# Altium PCB Smart_Farm_PCB.pcbdoc (part 2 of 2)
Units mm, origin at the board's own origin, x right, y up, seen from the top; angles counter-clockwise.
Board outline 238 x 152.38 mm, 2 copper layers (Top Layer, Bottom Layer); 109 components, 81 nets, 498 pads, 409 vias.
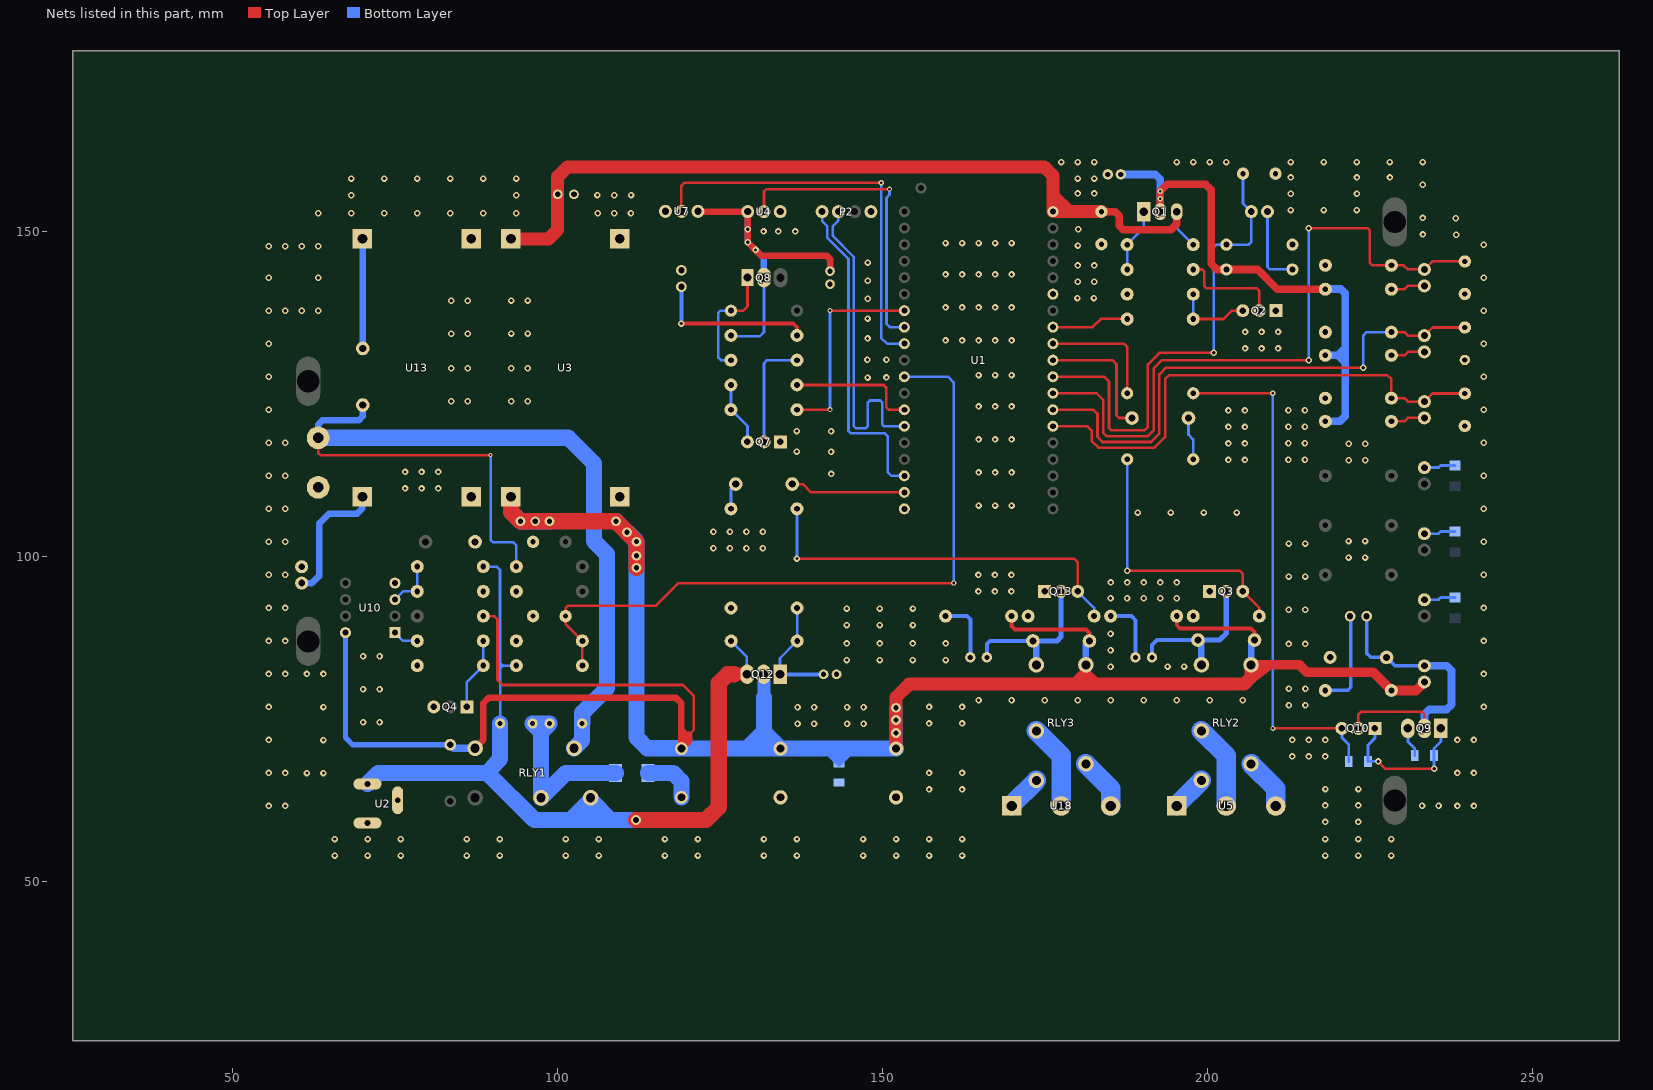
[diagram p2: the nets of this part, all layers, seen from the top]

## Via types
v1: diameter 1, hole 0.5, Top Layer to Bottom Layer, tented both sides, 377 vias
v2: diameter 0.8, hole 0.4, Top Layer to Bottom Layer, tented both sides, 18 vias
v3: diameter 1.5, hole 0.8, Top Layer to Bottom Layer, tented both sides, 12 vias
v4: diameter 0.62, hole 0.31, Top Layer to Bottom Layer, tented both sides, 1 vias
v5: diameter 1.5, hole 0.9, Top Layer to Bottom Layer, tented both sides, 1 vias

## Nets (pads, with @x,y where several pads share a name; then routed paths per layer and width w, separated by ;. In a path a pad name is that pad's centre, name@x,y a point inside that pad or via, vN(x,y) a via of type N, cw(c..) or ccw(c..) an arc to the next point about the centre after c; other vN are vias at no path point) (continued)
D5_1: D5.1 pad.2@197.091,121.235 R18.1 | length 6.7
  Bottom Layer w0.4: pad.2@197.091,121.235 197.091,118.667 197.82,117.938 R18.1@197.82,114.885
DHT_ENA: pad.1@136.86,122.515 pad.20@153.37,137.75 R12.1 U1.26 | length 31.8
  Top Layer w0.4: R12.1@136.86,122.515 136.874,122.53 v2(141.94,122.53) ; v2(141.94,137.78) 141.94,137.75 U1.26@153.37,137.75
  Bottom Layer w0.4: v2(141.94,122.53) v2(141.94,137.78)
DHT_PIN: pad.2@131.78,152.99 pad.20@153.37,135.21 U1.27 U4.2 | length 46.5
  Top Layer w0.4: U4.2@131.78,152.99 131.78,156.109 132.13,156.46 v2(151.1,156.46)
  Bottom Layer w0.4: v2(151.1,156.46) 151.099,155.591 150.629,155.121 150.629,135.741 151.16,135.21 U1.27@153.37,135.21
GND: C1.1 C3.1 C5.2 C6.1 C7.2 C8.1 C9.1 C10.1 C11.1 C12.1 C13.1 C14.1 D3.2 D4.1 LED3.2 P2.4 pad.1@78.44,83.14 pad.1@93.68,86.95 pad.1@93.68,94.57 pad.1@96.26,90.76 pad.1@96.26,102.19 pad.1@126.71,92.01 pad.1@136.86,126.325 pad.1@172.42,90.76 pad.1@174.96,94.57 pad.1@183.69,147.98 pad.1@187.66,140.285 pad.1@197.82,90.76 pad.1@200.36,94.57 pad.1@210.48,158.832 pad.1@210.52,137.75 pad.1@218.14,124.288 pad.1@218.14,134.448 pad.1@218.14,144.735 pad.1@239.603,140.33 pad.2@134.28,152.99 pad.2@141.94,141.83 pad.2@142.95,81.81 pad.2@233.38,93.28 pad.2@233.38,103.44 pad.2@233.38,113.6 pad.3@230.84,73.488 pad.4@75.011,95.84 pad.4@80.98,76.79 pad.20@153.37,122.51 Q2.1 Q3.1 Q4.3 Q7.1 Q9.3 Q13.1 R2.1 R3.1 R7.2 R13.2 R16.1 R19.1 R21.1 R23.1 R25.1 R26.1 R32.1 R35.1 R36.1 R39.1 R48.2 U1.6 U1.32 U1.38 U2.2 U2.3 U3.2 U3.4 U4.1 U7.3 U10.4 U11.2 U12.2 U13.2 U13.4 U15.1 U16.1 U17.1 U20.2 U21.2 U22.2 U23.2 | length 39
  Top Layer w0.4: R13.2@136.86,126.325 150.185,126.325 150.571,125.939 150.571,122.919 150.98,122.51 U1.32@153.37,122.51
  Bottom Layer w0.45: Q9.3@230.84,73.488 230.84,71.456 231.902,70.394 R25.1@231.901,69.297 ; U15.1@233.38,93.28 235.519,93.28 235.862,93.623 C6.1@238.079,93.622 ; U16.1@233.38,103.44 235.519,103.44 235.862,103.783 C8.1@238.079,103.782 ; U17.1@233.38,113.6 235.519,113.6 235.862,113.943 C9.1@238.079,113.942
  other v1: 65.74,53.93 70.82,53.93 75.9,53.93 86.06,53.93 91.14,53.93 101.3,53.93 106.38,53.93 116.54,53.93 121.62,53.93 131.78,53.93 136.86,53.93 147.02,53.93 152.1,53.93 157.18,53.93 162.26,53.93 218.14,53.93 223.22,53.93 228.3,53.93 65.74,56.47 70.82,56.47 75.9,56.47 86.06,56.47 91.14,56.47 101.3,56.47 106.38,56.47 116.54,56.47 121.62,56.47 131.78,56.47 136.86,56.47 147.02,56.47 152.1,56.47 157.18,56.47 162.26,56.47 218.14,56.47 223.22,56.47 228.3,56.47 218.14,59.09 223.22,59.09 55.58,61.55 58.12,61.55 238.46,61.55 241,61.55 233.02,61.57 235.56,61.57 218.14,61.63 223.22,61.63 157.18,64.09 162.26,64.09 218.16,64.15 223.24,64.15 55.58,66.63 58.12,66.63 61.47,66.62 64.01,66.62 157.18,66.63 162.26,66.63 238.46,66.63 241,66.63 213.06,69.17 215.6,69.17 218.14,69.17 55.58,71.71 64.01,71.7 213.06,71.71 215.6,71.71 218.14,71.71 238.46,71.71 241,71.71 136.94,74.22 139.48,74.22 144.56,74.22 147.1,74.22 157.18,74.25 162.26,74.25 70.1,74.42 72.64,74.42 136.94,76.76 139.48,76.76 144.56,76.76 147.1,76.76 55.58,76.79 64.01,76.78 157.18,76.79 162.26,76.79 242.524,76.79 212.54,77.04 215.08,77.04 164.8,77.806 169.88,77.806 174.96,77.806 180.04,77.806 185.12,77.806 190.2,77.806 195.28,77.806 200.36,77.806 205.44,77.806 70.1,79.5 72.64,79.5 212.54,79.58 215.08,79.58 55.58,81.87 58.12,81.87 61.47,81.86 64.01,81.86 242.524,81.87 185.1,82.98 193.87,83 196.41,83 144.51,84.01 149.59,84.01 154.67,84.01 159.75,84.01 70.1,84.58 72.64,84.58 185.1,85.52 212.5,86.48 215.04,86.48 144.51,86.55 149.59,86.55 154.67,86.55 159.75,86.55 55.58,86.95 58.12,86.95 242.524,86.95 185.1,88.06 144.53,89.39 149.61,89.39 154.69,89.39 212.51,91.76 215.05,91.76 144.53,91.93 149.61,91.93 154.69,91.93 55.58,92.03 58.12,92.03 242.524,92.03 185.11,93.53 187.65,93.53 190.19,93.53 192.73,93.53 195.27,93.53 164.77,94.56 167.31,94.56 169.85,94.56 185.13,95.95 187.67,95.95 190.21,95.95 192.75,95.95 195.29,95.95 212.51,96.84 215.05,96.84 55.58,97.11 58.12,97.11 164.77,97.1 167.31,97.1 169.85,97.1 242.524,97.11 221.719,99.77 224.259,99.77 124.01,101.2 126.55,101.2 129.09,101.2 131.63,101.2 212.51,101.92 215.05,101.92 55.58,102.19 58.12,102.19 242.524,102.19 221.719,102.31 224.259,102.31 124.01,103.74 126.55,103.74 129.09,103.74 131.63,103.74 189.29,106.69 194.37,106.69 199.45,106.69 204.53,106.69 55.58,107.27 58.12,107.27 242.524,107.27 164.8,107.778 167.34,107.778 169.88,107.778 76.57,110.4 79.11,110.4 81.65,110.4 55.58,112.35 58.12,112.35 242.524,112.35 142.12,112.63 164.8,112.858 167.34,112.858 169.88,112.858 76.57,112.94 79.11,112.94 81.65,112.94 221.75,114.74 224.29,114.74 203.23,114.79 205.77,114.79 212.47,114.8 215.01,114.8 142.11,116.06 136.81,116.07 221.75,117.28 224.29,117.28 203.23,117.33 205.77,117.33 212.47,117.34 215.01,117.34 55.58,117.43 58.12,117.43 242.524,117.43 164.8,117.938 167.34,117.938 169.88,117.938 142.11,119.21 136.84,119.24 203.23,119.87 205.77,119.87 212.47,119.88 215.01,119.88 203.23,122.41 205.77,122.41 212.47,122.42 215.01,122.42 55.58,122.51 242.524,122.51 164.8,123.018 167.34,123.018 169.88,123.018 83.67,123.81 86.21,123.81 92.91,123.82 95.45,123.82 147.72,127.46 150.62,127.48 55.58,127.59 242.524,127.59 164.8,127.844 167.34,127.844 169.88,127.844 83.67,128.89 86.21,128.89 92.91,128.9 95.45,128.9 147.7,130.19 150.62,130.2 205.79,131.94 208.33,131.94 210.87,131.94 55.58,132.67 242.524,132.67 159.72,133.178 162.26,133.178 164.8,133.178 167.34,133.178 169.88,133.178 147.71,133.48 83.67,134.22 86.21,134.22 92.91,134.23 95.45,134.23 205.79,134.48 208.33,134.48 210.87,134.48 147.71,136.55 55.58,137.75 58.12,137.75 60.66,137.75 63.2,137.75 242.524,137.75 159.72,138.258 162.26,138.258 164.8,138.258 167.34,138.258 169.88,138.258 83.67,139.3 86.21,139.3 92.91,139.31 95.45,139.31 147.73,139.59 180.01,139.7 182.55,139.7 180.04,142.21 182.58,142.21 147.75,142.37 55.58,142.83 63.2,142.83 242.524,142.83 159.72,143.338 162.26,143.338 164.8,143.338 167.34,143.338 169.88,143.338 180.04,144.72 182.58,144.72 147.75,145.16 55.58,147.656 58.12,147.656 60.66,147.656 63.2,147.656 180.09,147.77 242.524,147.91 159.72,148.164 162.26,148.164 164.8,148.164 167.34,148.164 169.88,148.164 238.269,149.42 233.159,149.49 131.71,149.94 133.99,149.94 136.6,149.94 180.12,150.28 238.21,151.99 233.13,152.03 63.2,152.736 68.28,152.736 73.36,152.736 78.44,152.736 83.52,152.736 88.6,152.736 93.68,152.736 106.19,152.73 111.32,152.73 108.75,152.75 212.81,153.24 217.89,153.24 222.97,153.24 68.28,155.53 93.68,155.53 108.73,155.52 106.16,155.55 111.34,155.55 212.84,155.75 222.999,155.75 180.04,155.784 182.58,155.784 233.13,157.14 68.28,158.07 73.36,158.07 78.44,158.07 83.52,158.07 88.6,158.07 93.68,158.07 180.04,158.07 182.58,158.07 212.84,158.26 222.999,158.26 228.079,158.26 177.5,160.61 180.04,160.61 182.58,160.61 195.28,160.61 197.82,160.61 200.36,160.61 202.9,160.61 212.806,160.61 217.886,160.61 222.966,160.61 228.046,160.61 233.126,160.61
LED1_1: LED1.1 pad.1@185.12,90.76 pad.1@188.93,84.41 R38.1 | length 9.8
  Bottom Layer w0.6: R38.1@185.12,90.76 188.295,90.76 188.93,90.125 LED1.1@188.93,84.41
LED3_1: LED3.1 pad.1@119.08,141.433 pad.1@136.86,133.945 R11.1 | length 24.9
  Top Layer w0.6: v1@119.07,135.779 136.291,135.779 136.86,135.21 R11.1@136.86,133.945
  Bottom Layer w0.6: v1(119.07,135.78) 119.07,141.423 LED3.1@119.08,141.433
LED5_1: LED5.1 pad.1@159.72,90.76 pad.1@163.53,84.41 R10.1 | length 9.9
  Bottom Layer w0.6: R10.1@159.72,90.76 163.022,90.76 163.53,90.252 LED5.1@163.53,84.41
LIGHT: D7.2 pad.2@136.131,111.08 pad.20@153.37,109.81 U1.37 | length 17.8
  Top Layer w0.4: pad.2@136.131,111.08 137.749,111.08 139.019,109.81 U1.37@153.37,109.81
MOTOR1: pad.20@176.23,132.67 R28.1 U1.9 | length 18.8
  Top Layer w0.4: U1.9@176.23,132.67 187.152,132.67 187.66,132.162 R28.1@187.66,125.045
MOTOR2: D5.2 pad.2@188.389,121.235 pad.20@176.23,130.13 U1.10 | length 20.5
  Top Layer w0.4: U1.10@176.23,130.13 185.374,130.13 186.009,129.495 186.009,121.621 186.395,121.235 D5.2@188.39,121.235
Q1_1: pad.1@187.66,144.095 pad.1@187.66,147.905 pad.1@190.2,152.99 Q1.1 R5.2 R6.1 | length 9.9
  Bottom Layer w0.4: R5.2@187.66,144.095 R6.1@187.66,147.905 190.2,150.445 Q1.1@190.2,152.99
Q1_2: pad.1@218.14,120.732 pad.1@218.14,130.892 pad.1@218.14,141.052 Q1.2 R1.2 R4.2 R22.2 R24.2 U21.1 | length 85.9
  Top Layer w1.2: Q1.2@192.74,152.99 v2(192.74,156.14) 193.809,157.209 199.689,157.209 200.589,156.31 200.589,144.961 201.45,144.1 R22.2@202.92,144.1 207.721,144.08 210.749,141.052 R4.2@218.14,141.052
  Bottom Layer w1.2: U21.1@186.68,158.72 191.969,158.721 192.741,157.949 v2@192.741,154.969 ; Q1.2@192.74,152.99 v2(192.74,154.968) ; R24.2@218.14,120.732 220.393,120.732 221.211,121.55 221.211,140.389 220.52,141.08 218.168,141.08 R4.2@218.14,141.052 ; R1.2@218.14,130.892 221.211,130.882 ; 220.056,130.886 221.211,132.04 221.211,132.209 ; 220.085,130.886 221.211,129.76 221.211,129.603
Q2_2: pad.1@197.82,144.095 pad.4@207.98,137.75 Q2.2 R5.1 | length 15.9
  Top Layer w0.4: R5.1@197.82,144.095 199.204,144.095 199.529,143.77 199.529,141.54 199.89,141.179 207.599,141.179 207.98,140.798 Q2.2@207.98,137.75
Q2_3: pad.1@197.82,136.475 pad.1@197.82,140.285 pad.4@205.44,137.75 Q2.3 R7.1 R8.2 | length 12
  Top Layer w0.4: R8.2@197.82,136.475 202.514,136.475 203.789,137.75 Q2.3@205.44,137.75
  Bottom Layer w0.4: R8.2@197.82,136.475 R7.1@197.82,140.285
Q3_2: D2.2 LED1.2 pad.1@191.47,84.41 pad.1@199.09,83.267 pad.2@198.549,87.077 pad.4@202.9,94.57 Q3.2 RLY2.1 | length 24.6
  Bottom Layer w0.6: LED1.2@191.47,84.41 191.47,86.315 192.232,87.077 D2.2@198.55,87.077
  Bottom Layer w0.8: D2.2@198.55,87.077 201.884,87.077 202.9,88.093 Q3.2@202.9,94.57
  Bottom Layer w1: D2.2@198.55,87.077 199.09,86.537 RLY2.1@199.09,83.267
Q3_3: pad.1@207.98,90.76 pad.4@205.44,94.57 Q3.3 R18.2 R19.2 | length 42.7
  Top Layer w0.4: v1(187.66,97.745) 204.932,97.745 205.44,97.237 Q3.3@205.44,94.57 207.98,92.03 R19.2@207.98,90.76
  Bottom Layer w0.4: v1(187.66,97.745) R18.2@187.66,114.885
Q4_1: pad.1@86.06,76.79 pad.1@88.6,83.14 pad.1@88.6,86.95 Q4.1 R9.2 R16.2 | length 11.2
  Bottom Layer w0.4: Q4.1@86.06,76.79 86.06,80.6 R16.2@88.6,83.14 R9.2@88.6,86.95
Q7_2: pad.1@136.86,130.135 pad.4@131.78,117.562 Q7.2 R15.1 | length 17.4
  Bottom Layer w0.4: Q7.2@131.78,117.562 131.78,129.66 132.255,130.135 R15.1@136.86,130.135
Q8_1: pad.1@126.698,130.135 Q8.1 R14.1 R15.2 | length 18.4
  Top Layer w0.4: R14.1@126.7,137.755 128.605,137.755 129.24,138.39 Q8.1@129.24,142.835
  Bottom Layer w0.4: pad.1@126.698,130.135 125.145,130.135 124.749,130.529 124.749,137.45 125.054,137.755 R14.1@126.7,137.755
Q8_2: pad.1@126.7,133.945 pad.2@141.94,143.83 pad.3@131.78,142.84 Q8.2 R11.2 U4.3 U7.1 U20.1 | length 52.9
  Top Layer w1: U7.1@121.62,153.04 121.669,152.99 U4.3@129.28,152.99 129.28,150.27 129.3,150.25 v1(129.3,148.28) v1(130.48,147.1) 131.35,146.23 141.41,146.23 141.94,145.7 U20.1@141.94,143.83
  Bottom Layer w0.4: R11.2@126.7,133.945 126.825,133.82 131.15,133.82 131.78,134.45 Q8.2@131.78,142.835
  Bottom Layer w1: U4.3@129.28,152.99 129.28,148.3 v1(129.3,148.28) 131.78,145.8 pad.3@131.78,142.84
  other v1: 129.28,150.27
Q9_1: pad.1@225.76,73.488 pad.1@235.92,73.488 Q9.1 Q10.1 R25.2 R29.1 | length 22.9
  Top Layer w0.4: v1(226.268,68.408) 227.411,67.265 232.618,67.265 v1(234.904,67.265)
  Bottom Layer w0.4: R29.1@224.699,68.408 v1(226.268,68.408) ; R25.2@234.859,69.297 234.859,67.31 v1(234.904,67.265)
  Bottom Layer w0.45: R29.1@224.699,68.408 224.698,70.902 225.76,71.964 Q10.1@225.76,73.488 ; R25.2@234.859,69.297 234.858,70.394 235.92,71.456 Q9.1@235.92,73.488
Q10_3: Q10.3 R28.2 R29.2 | length 80
  Top Layer w0.4: R28.2@197.82,125.045 197.835,125.06 v2(210.06,125.06) ; v2(210.07,73.49) 220.678,73.49 Q10.3@220.68,73.488
  Bottom Layer w0.4: v2(210.06,125.06) 210.07,125.05 210.07,73.99 v2(210.07,73.49)
  Bottom Layer w0.45: Q10.3@220.68,73.488 220.68,72.091 221.742,71.029 R29.2@221.741,68.408
Q12_1: pad.1@134.28,81.83 pad.1@136.87,92.01 pad.1@136.89,86.93 pad.2@140.949,81.81 Q12.1 R47.2 R48.1 U22.1 | length 18
  Bottom Layer w0.4: Q12.1@134.24,81.83 134.24,84.28 R47.2@136.89,86.93 ; R48.1@136.87,92.01 R47.2@136.89,86.93
  Bottom Layer w0.6: Q12.1@134.24,81.83 134.26,81.81 U22.1@140.95,81.81
R9_1: pad.1@78.44,86.95 R9.1 U10.1 | length 4
  Bottom Layer w0.4: U10.1@75.011,88.22 76.281,86.95 R9.1@78.44,86.95
R12_2: pad.1@126.7,122.515 pad.1@126.7,126.325 pad.4@129.24,117.562 Q7.3 R12.2 R13.1 | length 9.8
  Bottom Layer w0.4: R13.1@126.7,126.325 R12.2@126.7,122.515 129.24,119.975 Q7.3@129.24,117.562
R27_1: F3.2 R27.1 | length 8.1
  Bottom Layer w2.5: F3.2@113.96,66.63 117.81,66.63 119.08,65.36 R27.1@119.08,62.881
R30_2: LED4.1 pad.1@218.14,79.33 pad.1@221.95,90.76 R30.2 | length 15.1
  Bottom Layer w0.55: R30.2@218.14,79.33 221.569,79.33 222.077,79.838 222.077,90.633 LED4.1@221.95,90.76
R54_1: D7.1 pad.1@126.7,107.27 pad.2@127.43,111.08 R54.1 | length 4.1
  Bottom Layer w0.4: R54.1@126.7,107.27 126.7,110.35 D7.1@127.43,111.08
R54_2: pad.1@136.86,107.27 pad.1@182.58,90.76 pad.4@180.04,94.57 Q13.3 R39.2 R54.2 | length 60.4
  Top Layer w0.4: v1(136.86,99.61) 179.499,99.609 180.04,99.071 Q13.3@180.04,94.57
  Bottom Layer w0.4: v1(136.86,99.61) R54.2@136.86,107.27 ; Q13.3@180.04,94.57 182.58,92.03 R39.2@182.58,90.76
RLY2_3: pad.1@206.71,68.027 RLY2.3 U5.3 | length 8.1
  Bottom Layer w3: RLY2.3@206.71,68.027 210.52,64.217 U5.3@210.52,61.55
RLY2_4: pad.1@199.09,73.107 RLY2.4 U5.2 | length 13.1
  Bottom Layer w3: RLY2.4@199.09,73.107 202.9,69.297 U5.2@202.9,61.55
RLY2_5: pad.1@199.09,65.487 RLY2.5 U5.1 | length 5.5
  Bottom Layer w3: U5.1@195.28,61.55 195.28,61.677 RLY2.5@199.09,65.487
RLY3_1: D8.2 LED5.2 pad.1@166.07,84.41 pad.1@173.69,83.267 pad.2@173.149,86.95 pad.4@177.5,94.57 Q13.2 RLY3.1 | length 24.8
  Bottom Layer w0.6: LED5.2@166.07,84.41 166.07,86.442 166.578,86.95 D8.2@173.15,86.95
  Bottom Layer w0.8: D8.2@173.15,86.95 176.865,86.95 177.5,87.585 Q13.2@177.5,94.57
  Bottom Layer w1: D8.2@173.15,86.95 173.69,86.41 RLY3.1@173.69,83.267
S$140: 
S$142: 
S$259: 
S$6626: 
S$81491: 
S$81495: 
S$81499: 
S$81503: 
S$81507: 
S$81511: 
S$81515: 
S$81519: 
S$81523: 
S$81527: 
S$81531: 
S$81535: 
SCL: P2.1 pad.20@153.37,112.35 U1.36 | length 50.1
  Bottom Layer w0.4: P2.1@140.731,152.99 140.731,151.55 141.539,150.74 141.539,148.959 144.79,145.71 144.79,119.259 145.178,118.87 150.391,118.87 150.83,118.431 150.83,112.881 151.361,112.35 U1.36@153.37,112.35
SDA: P2.2 pad.20@153.37,119.97 U1.33 | length 50.1
  Bottom Layer w0.4: P2.2@143.23,152.99 143.23,151.621 142.339,150.729 142.339,149.299 145.59,146.051 145.59,120 145.9,119.691 147.449,119.691 147.769,120.011 147.769,123.64 148.059,123.93 149.669,123.93 149.949,123.65 149.949,120.29 150.269,119.97 U1.33@153.37,119.97
SENSOR1: C11.2 pad.1@228.3,134.448 pad.2@233.38,133.92 pad.2@239.603,135.17 pad.20@176.23,122.51 R32.2 U1.13 U9.1 | length 83.5
  Top Layer w0.4: U1.13@176.23,122.51 182.453,122.51 183.088,121.875 183.088,118.319 183.85,117.557 191.343,117.557 192.613,118.827 192.613,127.971 193.629,128.987 v1(223.982,128.987) ; R32.2@228.3,134.448 230.332,134.448 230.86,133.92 U9.1@233.38,133.92 234.63,135.17 C11.2@239.603,135.17
  Bottom Layer w0.4: v1(223.982,128.987) 223.982,133.94 224.49,134.448 R32.2@228.3,134.448
SENSOR2: C12.2 pad.1@228.3,144.735 pad.2@233.38,144.1 pad.2@239.603,145.329 pad.20@176.23,125.05 R2.2 U1.12 U14.1 | length 105.9
  Top Layer w0.4: U1.12@176.23,125.05 182.961,125.05 183.977,124.034 183.977,118.954 184.485,118.446 190.835,118.446 191.724,119.335 191.724,128.86 192.994,130.13 v1(215.6,130.13) ; v1(215.6,150.45) 224.617,150.45 224.998,150.069 224.998,145.116 225.379,144.735 R2.2@228.3,144.735 230.205,144.735 230.84,144.1 pad.2@233.38,144.1 234.609,145.329 pad.2@239.603,145.329
  Bottom Layer w0.4: v1(215.6,130.13) v1(215.6,150.45)
SENSOR3: C13.2 pad.2@205.48,158.832 pad.2@206.75,152.99 pad.20@176.23,127.59 R3.2 U1.11 U6.1 | length 76.3
  Top Layer w0.4: U1.11@176.23,127.59 184.104,127.59 184.866,126.828 184.866,119.716 185.247,119.335 190.327,119.335 190.835,119.843 190.835,129.495 192.613,131.273 v1(200.995,131.273)
  Bottom Layer w0.4: v1(200.995,131.273) 200.995,147.529 201.376,147.91 R3.2@202.92,147.91 206.329,147.91 206.751,148.332 U6.1@206.75,152.99 205.48,154.26 C13.2@205.48,158.832
SENSOR4: C14.2 pad.1@228.3,124.288 pad.2@233.38,123.76 pad.2@239.603,125.01 pad.20@176.23,119.97 R23.2 U1.14 U19.1 | length 79.5
  Top Layer w0.4: U1.14@176.23,119.97 181.564,119.97 182.199,119.335 182.199,117.684 183.215,116.668 191.851,116.668 193.502,118.319 193.502,127.209 194.137,127.844 227.665,127.844 228.3,127.209 R23.2@228.3,124.288 230.332,124.288 230.86,123.76 U19.1@233.38,123.76 234.63,125.01 C14.2@239.603,125.01
SENSOR_ENA: pad.1@187.66,136.475 pad.20@176.23,135.21 R8.1 U1.8 | length 12
  Top Layer w0.4: U1.8@176.23,135.21 182.326,135.21 183.604,136.483 R8.1@187.66,136.475
U6_2: pad.2@209.25,152.99 R22.1 U6.2 | length 12.5
  Bottom Layer w0.4: U6.2@209.25,152.99 209.25,144.481 209.631,144.1 R22.1@213.08,144.1
U8_1: D3.1 LED4.2 pad.1@224.49,90.76 pad.2@227.571,84.41 pad.2@233.38,83.12 pad.3@233.38,73.488 pad.4@223.22,73.488 Q9.2 Q10.2 U8.1 | length 46.9
  Top Layer w0.4: Q10.2@223.22,73.488 223.22,75.647 223.601,76.028 232.999,76.028 233.38,75.647 Q9.2@233.38,73.488
  Bottom Layer w0.55: LED4.2@224.49,90.76 224.49,85.045 225.125,84.41 pad.2@227.571,84.41 ; D3.1@227.57,84.41 228.86,83.12 U8.1@233.38,83.12
  Bottom Layer w1.2: Q9.2@233.38,73.488 233.38,75.647 234.142,76.409 236.809,76.409 237.571,77.171 237.571,82.378 236.829,83.12 U8.1@233.38,83.12
U9_2: pad.1@228.3,130.892 pad.2@233.38,131.42 R1.1 U9.2 | length 5.3
  Top Layer w0.4: R1.1@228.3,130.892 230.332,130.892 230.86,131.42 U9.2@233.38,131.42
U10_3: pad.1@78.44,94.57 pad.1@78.44,98.38 pad.4@75.011,93.3 R20.1 R21.2 U10.3 | length 7.8
  Bottom Layer w0.4: U10.3@75.011,93.3 76.281,94.57 R21.2@78.44,94.57 R20.1@78.44,98.38
U11_1: pad.1@70,109.129 pad.2@60.66,95.84 U11.1 U13.1 | length 20.6
  Bottom Layer w1: pad.2@60.66,95.84 62.24,95.84 63.327,96.927 63.327,104.984 64.851,106.508 69.169,106.508 70,107.339 pad.1@70,109.129
U13_3: D6.2 pad.1@70,148.809 pad.2@70.058,131.941 U13.3 | length 16.9
  Bottom Layer w1: pad.1@70,148.809 70.058,148.809 D6.2@70.058,131.94
U14_2: pad.1@228.3,141.052 pad.2@233.38,141.56 R4.1 U14.2 | length 5.3
  Top Layer w0.4: R4.1@228.3,141.052 230.332,141.052 230.86,141.58 U14.2@233.38,141.58
U18_1: pad.1@173.69,65.487 RLY3.5 U18.1 | length 5.5
  Bottom Layer w3: U18.1@169.88,61.55 169.88,61.677 RLY3.5@173.69,65.487
U18_2: pad.1@173.69,73.107 RLY3.4 U18.2 | length 13.1
  Bottom Layer w3: RLY3.4@173.69,73.107 177.5,69.297 U18.2@177.5,61.55
U18_3: pad.1@181.31,68.027 RLY3.3 U18.3 | length 8.1
  Bottom Layer w3: RLY3.3@181.31,68.027 185.12,64.217 U18.3@185.12,61.55
U19_2: pad.1@228.3,120.732 pad.2@233.38,121.26 R24.1 U19.2 | length 5.3
  Top Layer w0.4: R24.1@228.3,120.732 230.332,120.732 230.86,121.26 U19.2@233.38,121.26
UV_SENSOR: pad.1@119.121,153.041 pad.20@153.37,132.67 U1.28 U7.2 | length 62.7
  Top Layer w0.4: U7.2@119.12,153.04 119.06,153.099 119.06,156.95 119.55,157.44 v2(149.82,157.44)
  Bottom Layer w0.4: v2(149.82,157.44) 149.82,133.57 150.72,132.67 U1.28@153.37,132.67
VBAT: C2.2 D6.1 pad.1@93.68,98.38 pad.1@102.57,70.44 pad.2@70.058,123.239 R37.2 RLY1.3 U12.1 | length 154.8
  Top Layer w0.4: U12.1@63.2,118.192 63.2,115.89 63.55,115.54 v4(89.74,115.54)
  Bottom Layer w0.4: v4(89.74,115.54) 89.74,102.509 90.13,102.12 93.21,102.12 93.68,101.65 R37.2@93.68,98.38
  Bottom Layer w1: U12.1@63.2,118.192 63.2,120.224 63.835,120.859 69.423,120.859 70.058,121.494 pad.2@70.058,123.239
  Bottom Layer w2.5: U12.1@63.2,118.192 101.681,118.192 105.618,114.255 105.618,108.591 ; RLY1.3@102.57,70.44 103.8,71.67 C2.2@103.8,74.25 ; 104.856,76.917 103.84,75.901 103.84,74.29 C2.2@103.8,74.25 ; 105.618,108.786 105.618,102.317 107.63,100.305 107.63,79.691 103.799,75.86 C2.2@103.8,74.25
VCC: C1.2 pad.1@92.86,148.809 pad.1@197.82,147.905 pad.2@183.69,152.98 pad.20@176.24,152.98 Q1.3 R6.2 U1.1 U3.3 U23.1 | length 131.9
  Top Layer w1.2: C1.2@183.688,152.98 185.809,152.98 186.439,152.35 186.439,150.839 187.079,150.199 194.389,150.199 195.281,151.091 Q1.3@195.28,152.98
  Top Layer w2: pad.1@92.86,148.809 98.661,148.809 100.05,150.201 U23.1@100.05,155.657 100.05,158.37 101.57,159.89 174.88,159.89 176.23,158.54 U1.1@176.23,152.99 pad.20@176.24,152.98 C1.2@183.69,152.98 ; 176.23,155.466 178.757,152.98
  Bottom Layer w0.4: Q1.3@195.28,152.98 195.28,150.445 R6.2@197.82,147.905
VDC: C4.2 pad.1@88.6,98.38 pad.1@93.68,83.14 pad.1@105.11,62.82 pad.1@126.73,86.93 pad.3@129.2,81.83 Q12.3 R20.2 R34.2 R47.1 RLY1.5 U2.1 | length 152.7
  Top Layer w2: 126.179,81.829 Q12.3@129.16,81.83
  Top Layer w2.5: v5(112.095,59.391) 122.843,59.392 124.811,61.36 124.811,80.461 126.18,81.83 127.222,81.83
  Bottom Layer w0.4: R20.2@88.6,98.38 90.66,98.38 91.17,97.869 91.17,83.569 91.6,83.14 R34.2@93.68,83.14 91.63,83.14 91.181,82.69 C4.2@91.18,74.25 ; 91.17,83.069 91.17,82.256 91.17,83.78 ; R47.1@126.73,86.93 129.16,84.5 Q12.3@129.16,81.83
  Bottom Layer w2: 101.186,59.391 101.681,59.391 RLY1.5@105.11,62.82 ; 105.081,59.391 105.081,62.791 RLY1.5@105.11,62.82 ; v5(112.095,59.391) 108.539,59.391 RLY1.5@105.11,62.82
  Bottom Layer w2.5: U2.1@70.779,64.931 72.479,66.63 89.235,66.63 ; C4.2@91.18,74.25 91.18,68.829 89.235,66.63 ; 101.186,59.391 v5(112.095,59.391) ; 105.415,59.391 96.474,59.391 89.235,66.63
VIN: C5.1 C7.1 D1.1 D2.1 D8.1 pad.1@87.33,70.44 pad.1@92.86,109.129 pad.1@169.88,90.76 pad.1@181.31,83.267 pad.1@195.28,90.76 pad.1@206.71,83.267 pad.1@228.3,79.33 pad.2@181.851,86.95 pad.2@207.251,87.077 pad.2@233.38,80.62 pad.3@131.74,81.83 pad.4@67.391,88.22 Q12.2 R10.2 R17.1 R26.2 R27.2 R30.1 R38.2 RLY1.2 RLY2.2 RLY3.2 U3.1 U8.2 U10.8 | length 436.9
  Top Layer w0.4: R17.1@88.6,90.76 88.63,90.73 90.32,90.73 90.78,90.27 90.78,80.96 91.57,80.17 119.33,80.17 121,78.5 121,73.28 119.08,71.36 R27.2@119.08,70.379
  Top Layer w0.6: R10.2@169.88,90.76 169.88,89.236 170.388,88.728 181.31,88.728 181.851,88.187 pad.2@181.851,86.95 ; R38.2@195.28,90.76 195.28,89.363 195.788,88.855 206.71,88.855 207.251,88.314 pad.2@207.251,87.077
  Top Layer w1: RLY1.2@87.33,70.44 88.6,71.71 88.6,77.369 89.4,78.169 118.26,78.169 119.08,77.349 R27.2@119.08,70.379 120.261,71.56 120.261,72.519 119.08,72.519 ; 119.08,74.077 119.08,73.195 119.998,72.278
  Top Layer w1.2: 179.085,80.3 181.31,82.525 RLY3.2@181.31,83.267 ; 181.31,80.3 RLY3.2@181.31,83.267 ; 183.314,80.3 181.31,82.305 RLY3.2@181.31,83.267
  Top Layer w1.5: 206.71,81.339 205.669,80.3 209.555,83.267 ; RLY2.2@206.71,83.267 214.163,83.267 215.32,82.11 225.52,82.11 R30.1@228.3,79.33 232.09,79.33 U8.2@233.38,80.62
  Top Layer w2: C5.1@152.1,70.38 152.1,78.29 154.11,80.3 205.67,80.3 206.71,81.34 RLY2.2@206.71,83.267
  Top Layer w2.5: pad.1@92.86,109.129 92.86,106.8 v3(94.31,105.35) v3(96.58,105.35) v3(98.772,105.35) v3(109.019,105.35) v3(110.716,103.654) v3(112.151,102.221) v3(112.151,100.049) v3(112.151,98.21)
  Bottom Layer w0.8: U10.8@67.391,88.22 67.391,72.068 68.481,70.981 D1.1@83.52,70.98
  Bottom Layer w1: 140.787,70.38 141.066,70.38 R26.2@143.337,68.109 ; 143.055,70.38 143.055,68.391 R26.2@143.337,68.109 ; 143.817,70.38 143.817,68.589 R26.2@143.337,68.109 ; 145.686,70.38 145.608,70.38 R26.2@143.337,68.109 ; RLY3.2@181.31,83.267 181.31,86.41 D8.1@181.85,86.95 ; RLY2.2@206.71,83.267 206.71,86.537 D2.1@207.25,87.077
  Bottom Layer w1.2: D1.1@83.52,70.98 84.06,70.44 RLY1.2@87.33,70.44
  Bottom Layer w2: Q12.2@131.7,81.83 131.77,81.76 131.77,78.25 ; C5.1@152.1,70.38 v3(152.1,72.77) v3(152.1,74.777) v3(152.1,76.68)
  Bottom Layer w2.5: pad.1@92.86,109.129 92.86,106.82 v3@94.315,105.365 ; v3(94.31,105.35) v3(98.772,105.35) ; v3@109.047,105.365 112.161,102.251 112.161,72.109 113.83,70.44 119.019,70.44 R27.2@119.08,70.379 129.179,70.379 131.77,72.97 131.77,78.25 ; 127.726,70.379 C7.1@134.32,70.379 ; 131.77,72.777 131.922,72.777 C7.1@134.32,70.379 ; C5.1@152.1,70.38 C7.1@134.32,70.38
  other v3: 112.151,98.21
VIN0: C2.1 C4.1 F3.1 pad.1@97.49,62.82 RLY1.4 | length 30.9
  Bottom Layer w2.5: 97.49,71.525 97.49,72.939 C2.1@98.8,74.25 ; C2.1@98.8,74.25 C4.1@96.18,74.25 97.49,72.94 RLY1.4@97.49,62.82 101.3,66.63 F3.1@108.96,66.63
VSEN: C3.2 pad.1@103.84,83.14 pad.1@103.84,86.95 pad.2@101.259,90.76 pad.20@153.37,127.59 R34.1 R36.2 U1.30 | length 110.1
  Top Layer w0.4: R34.1@103.84,83.14 R36.2@103.84,86.95 101.26,89.53 C3.2@101.26,90.76 101.259,91.999 101.62,92.36 115.181,92.36 118.661,95.84 v2(160.97,95.86)
  Bottom Layer w0.4: U1.30@153.37,127.59 160.119,127.59 160.97,126.739 v2(160.97,95.86)
pads on no net: U1.2 U1.3 U1.4 U1.5 U1.7 U1.18 U1.20 U1.21 U1.22 U1.23 U1.24 U1.25 U1.29 U1.34 U1.35 U10.5 U10.6 U10.7

## Polygon pours and split planes (outlines as drawn)
GND on Top Layer (solid): 42.95,154.46 51.88,154.46 62.42,165 239.49,165 250.66,153.83 250.66,54.02 237.68,41.04 214.15,41.04 212.35,38.1 210.07,40.61 213.97,44.65 215.55,46.23 215.55,64.02 202.83,76.74 169.8,76.74 164.73,71.67 164.73,50.52 160.74,46.53 54.31,46.53 47.97,52.87
GND on Bottom Layer (solid): 38.1,155.06 51.92,154.54 62.46,165.08 239.53,165.08 250.7,153.91 250.7,54.1 237.72,41.12 214.19,41.12 214.01,41.3 214.01,44.73 215.59,46.31 215.59,64.1 202.87,76.82 169.84,76.82 164.77,71.75 164.77,50.6 160.78,46.61 54.35,46.61 48.01,52.95

## Keep-outs
Keep-Out Layer:
  lines w0.254 net S$6626: 53.165,62.439 ccw(c55.707,62.426) 55.694,59.884 ; 53.165,151.352 cw(c55.707,151.339) 55.72,153.881 ; 59.513,153.877 ccw(c59.525,156.419) 62.067,156.406 ; 59.545,59.882 cw(c59.532,57.34) 62.074,57.327 ; 62.057,159.867 cw(c64.599,159.854) 64.612,162.396 ; 62.074,53.921 ccw(c64.616,53.908) 64.602,51.366 ; 232.426,51.402 ccw(c232.439,53.943) 234.981,53.93 ; 232.484,162.402 cw(c232.471,159.86) 235.013,159.847 ; 234.971,57.352 cw(c237.513,57.339) 237.526,59.881 ; 235.013,156.428 ccw(c237.555,156.415) 237.535,153.873 ; 242.163,59.891 ccw(c242.176,62.432) 244.718,62.419 ; 242.199,153.884 cw(c242.186,151.342) 244.728,151.329

## Silkscreen, mask and mechanical layers (free items; w line width, h text height)
Bottom Solder:
  lines w0.8 net S$81491: 171.04,62.71 171.04,62.74 173.16,64.86
  lines w0.8 net S$81495: 176.01,70.75 174.91,71.85 ; 174.91,71.85 174.91,71.85
  lines w0.8 net S$81499: 176.7,70.03 176.7,70.01 177.4,69.31 177.4,67.66
  lines w0.8 net S$81503: 177.48,63.54 177.48,66.04
  lines w0.8 net S$81507: 182.58,66.86 182.6,66.86 183.96,65.5
  lines w0.8 net S$81511: 184.66,64.77 185.06,64.37 185.06,63.54
  lines w0.8 net S$81515: 196.06,62.41 196.09,62.41 198.94,65.26
  lines w0.8 net S$81519: 200.32,71.77 200.33,71.77 201.27,70.83
  lines w0.8 net S$81523: 202.21,69.94 202.22,69.94 203.07,69.09 203.07,67.61
  lines w0.8 net S$81527: 202.97,64.23 202.97,65.51
  lines w0.8 net S$81531: 207.92,66.78 207.96,66.78 209.15,65.59
  lines w0.8 net S$81535: 210.04,64.78 210.57,64.25 210.57,63.74

## Text inside footprints (layer, text, board x,y; h text height)
U1: Top Overlay "ESP-WROOM-32" at 170.845,127.996 h1.02 r180; Top Overlay "Designed by Jobson" at 154.546,150.572 h0.76 r270
U3: Top Overlay "+" at 91.831,152.008 h2.03 r225; Top Overlay "+" at 92.762,105.508 h2.03 r225; Top Overlay "-" at 111.15,105.806 h2.03 r180; Top Overlay "-" at 110.22,151.996 h2.03 r180; Top Overlay "IN" at 101.144,106.96 h2.03 r270; Top Overlay "OUT" at 104.02,154.786 h2.03 r180; Top Overlay "LM2596" at 98.526,118.43 h2.03 r90; Top Overlay ">>>" at 97.906,108.82 h2.03 r90; Top Overlay ">>>" at 105.618,110.826 h2.03 r90
U13: Top Overlay "+" at 70.408,152.008 h2.03 r135; Top Overlay "+" at 69.902,104.072 h2.03 r315; Top Overlay "-" at 88.29,105.806 h2.03 r180; Top Overlay "-" at 87.36,151.996 h2.03 r180; Top Overlay "IN" at 78.284,106.96 h2.03 r270; Top Overlay "OUT" at 81.16,154.786 h2.03 r180; Top Overlay "LM2596" at 76.916,117.303 h2.03 r90; Top Overlay ">>>" at 75.046,108.82 h2.03 r90; Top Overlay ">>>" at 84.966,109.13 h2.03 r90
U23: Top Overlay "-" at 102.816,156.546 h1 r90; Top Overlay "+" at 99.622,157.027 h1 r135